# Altium PCB balancing_robot_board.PcbDoc (part 1 of 2)
Units mm, origin at the board's own origin, x right, y up, seen from the top; angles counter-clockwise.
Board outline 65.02 x 38.99 mm, 2 copper layers (Top Layer, Bottom Layer); 76 components, 73 nets, 356 pads, 230 vias.
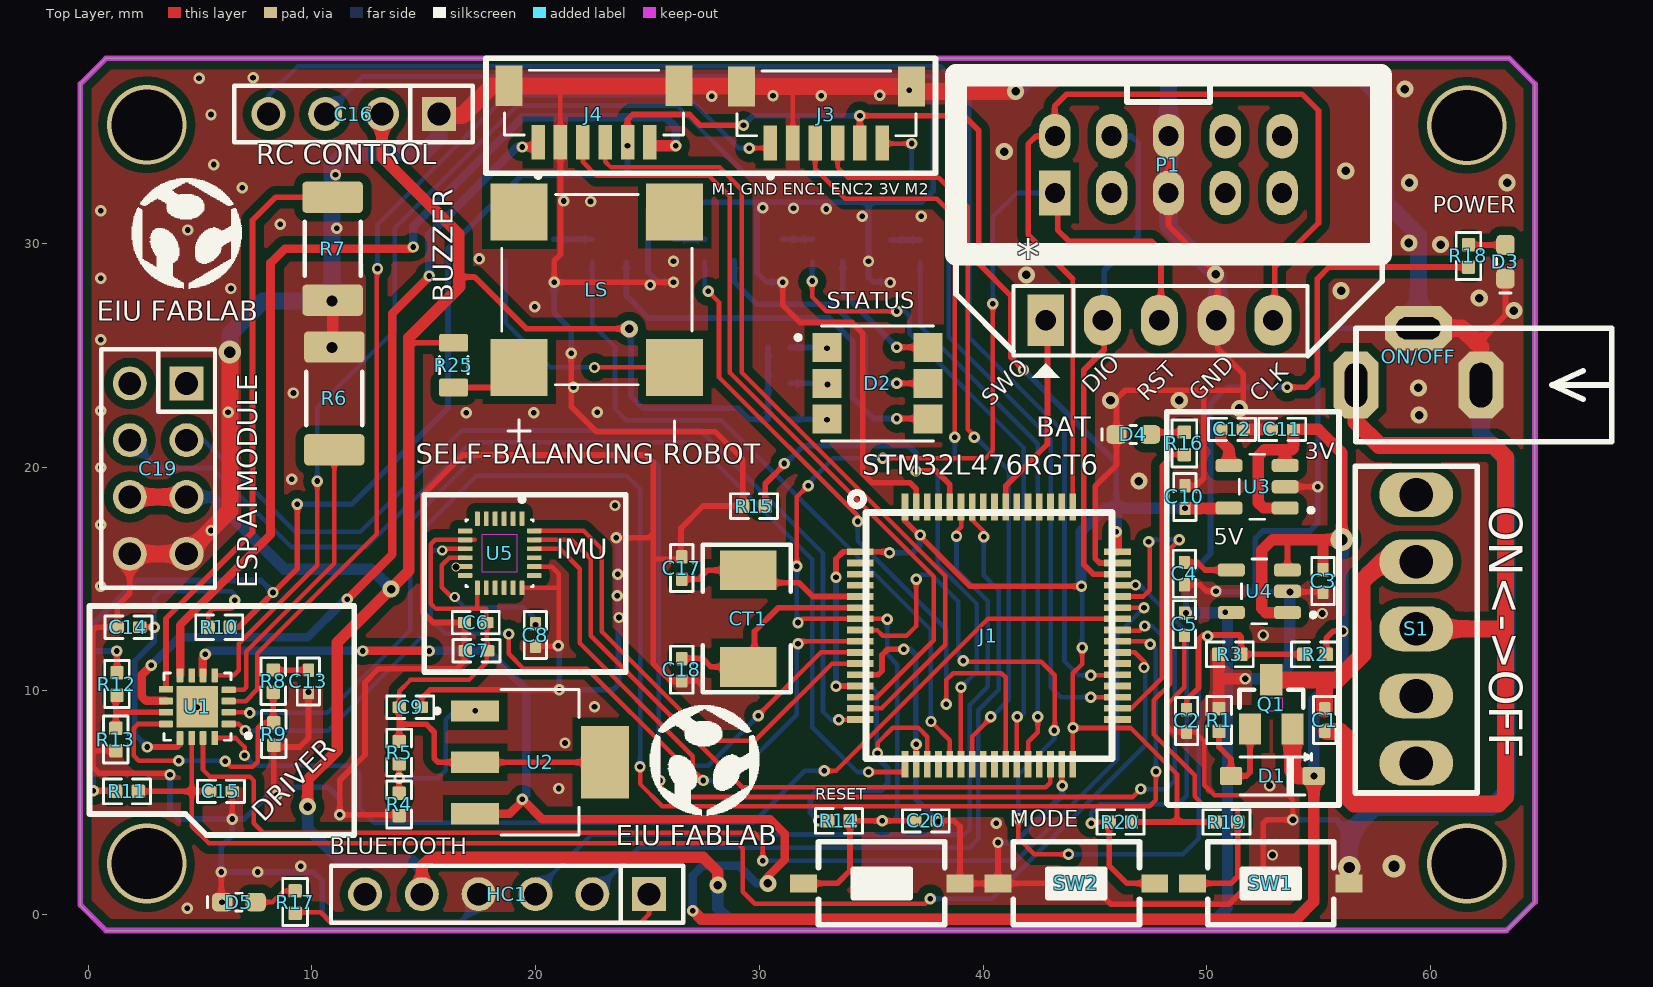
[diagram p0: Top Layer view]
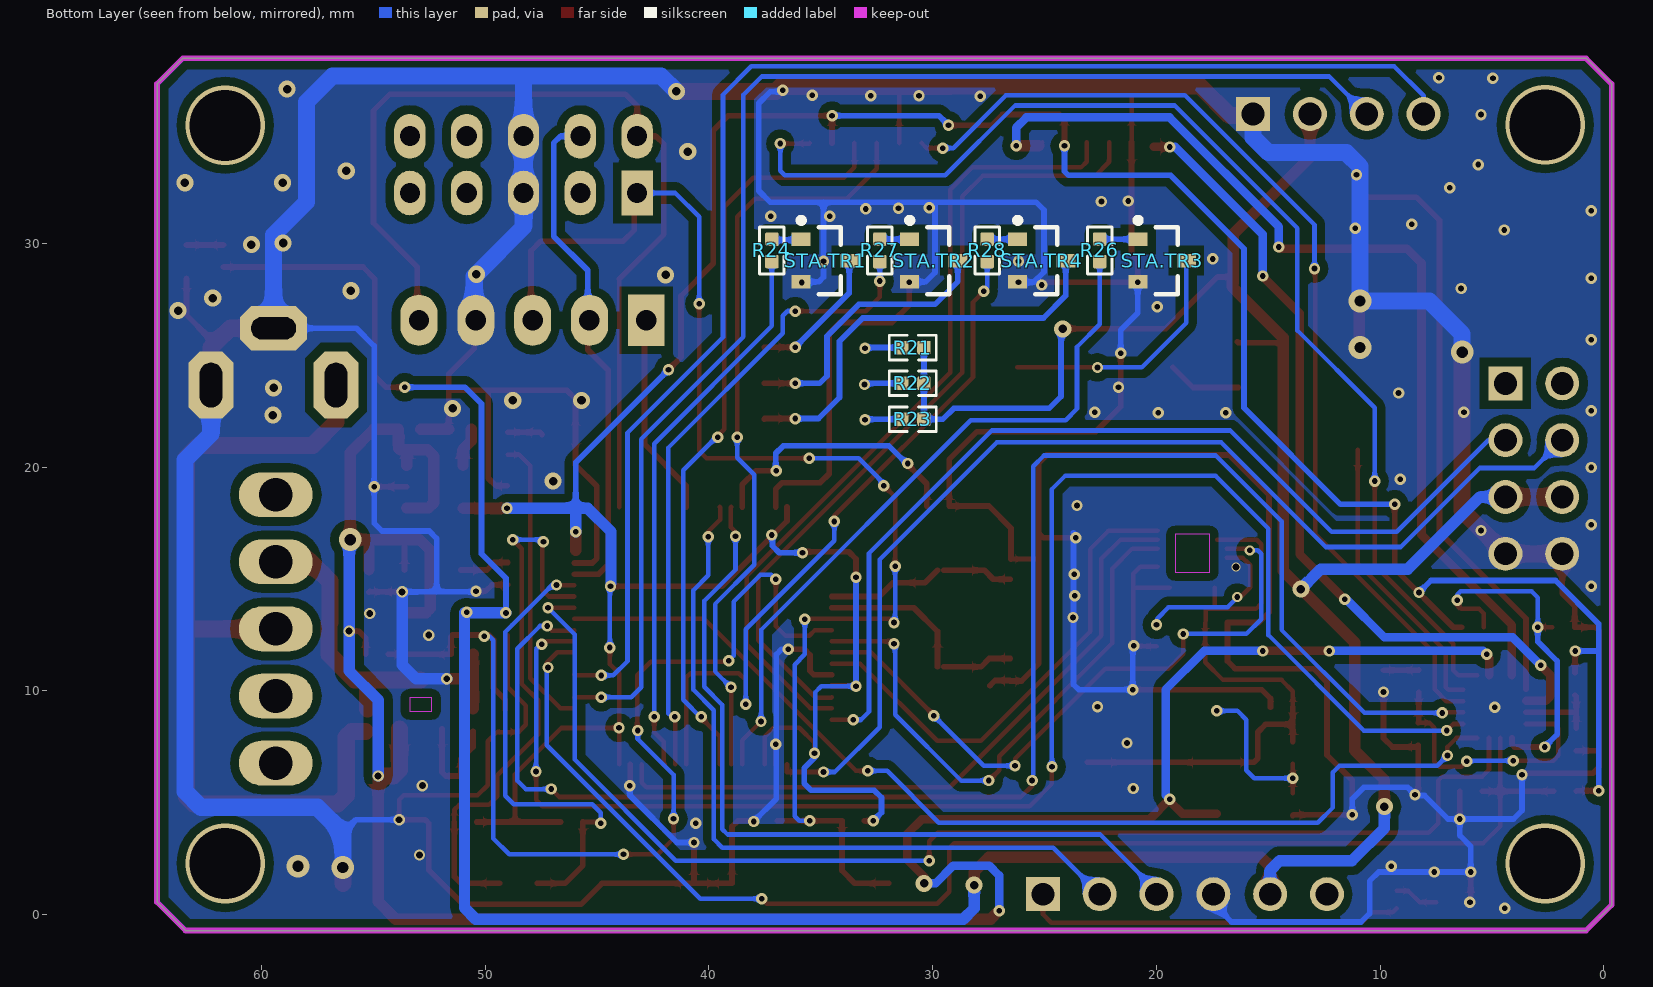
[diagram p1: Bottom Layer view, seen from below]
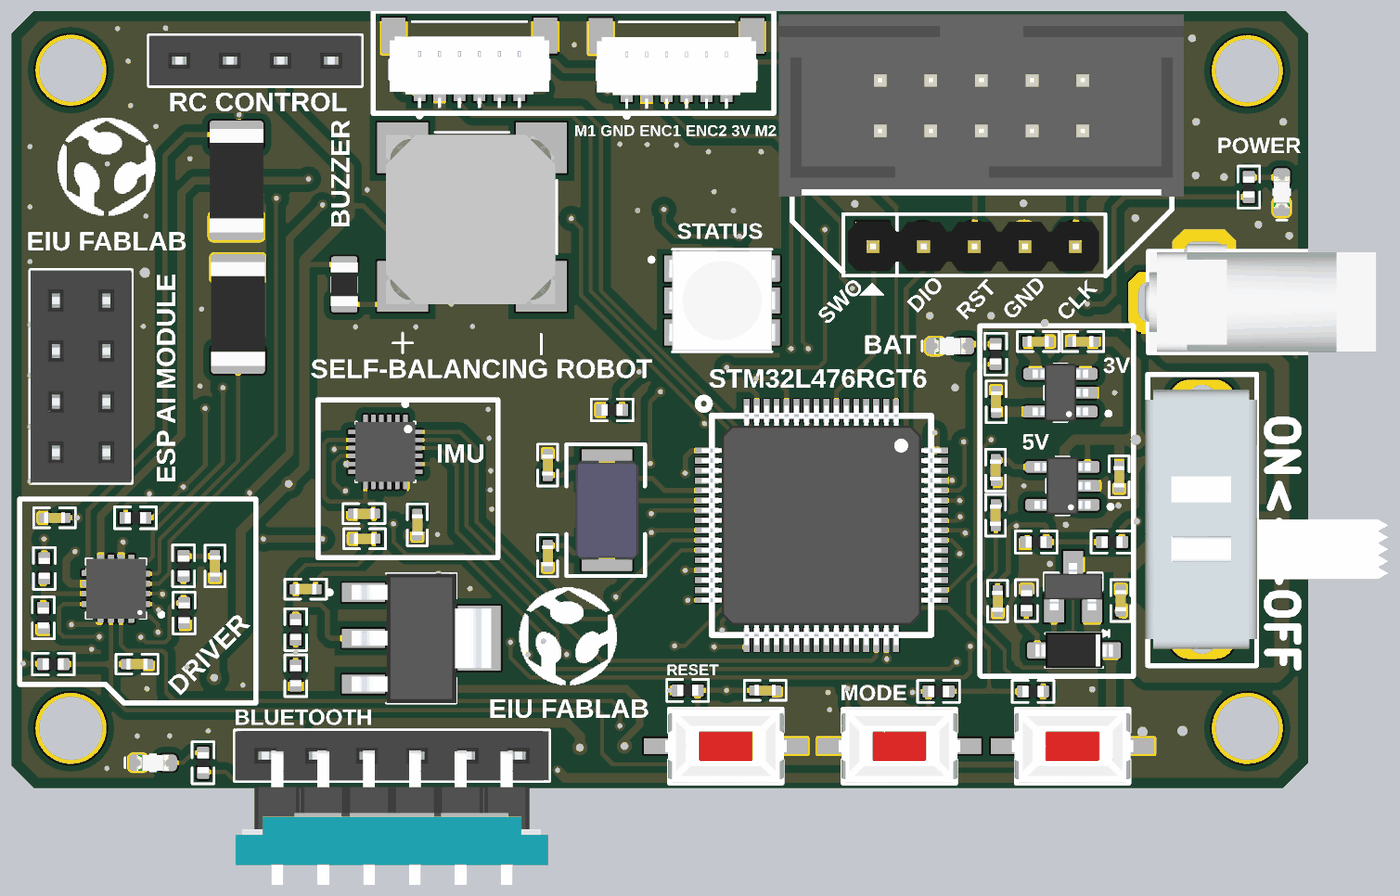
[diagram p2: 3D render of the assembled board from above, using the file's embedded part models]
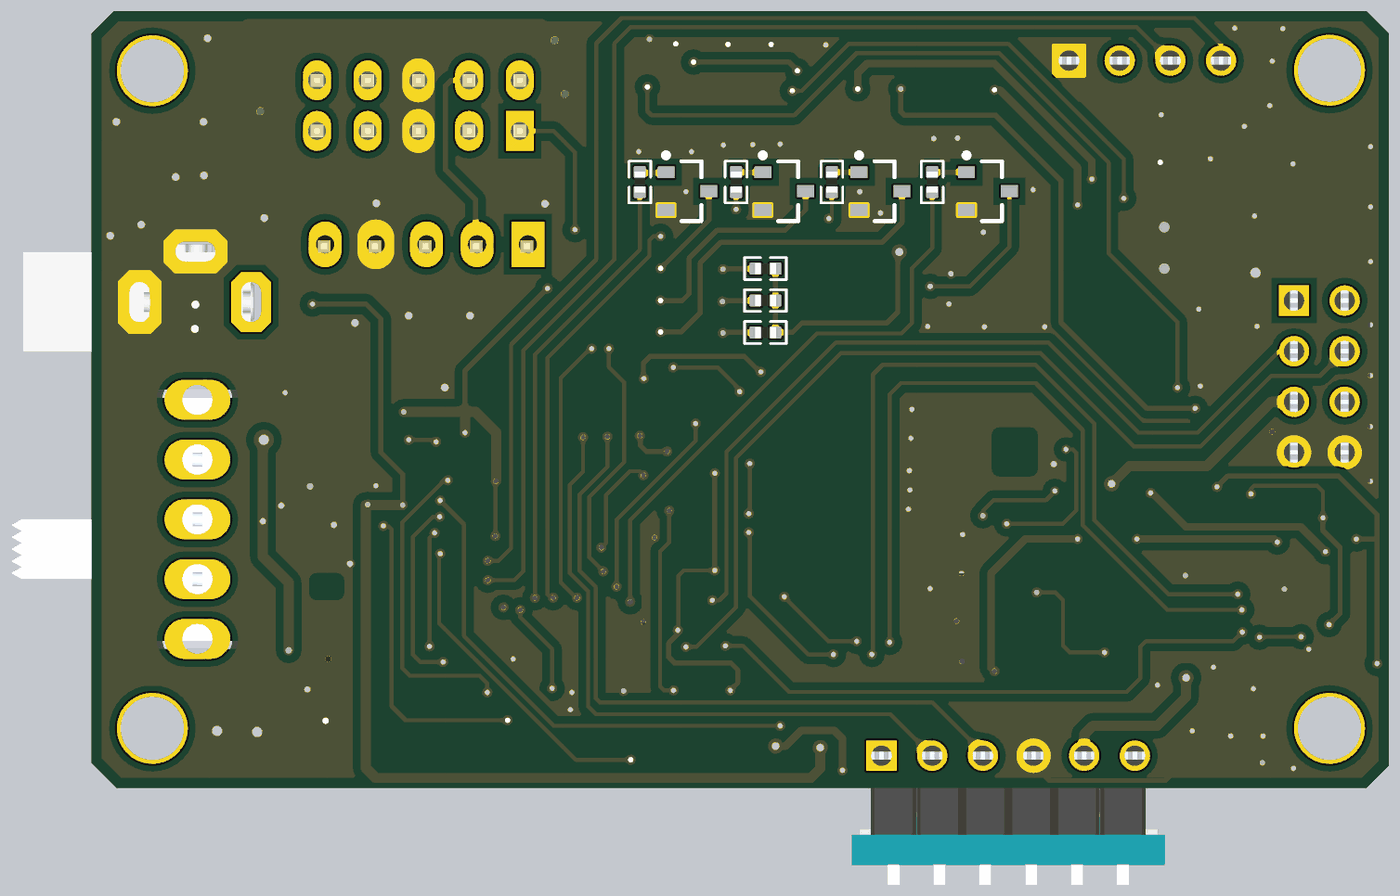
[diagram p3: 3D render of the assembled board from below, using the file's embedded part models]

## Layer stack, top to bottom
Top Solder: solder mask 0.0102, Solder Resist, Dk 3.5
Top Layer: signal copper 0.0356
Dielectric 1: dielectric 0.32, FR-4, Dk 4.8
Bottom Layer: signal copper 0.0356
Bottom Solder: solder mask 0.0102, Solder Resist, Dk 3.5

## Board outline
63.398,-0.711 0.787,-0.711 -0.356,0.432 -0.356,37.135 0.787,38.278 63.525,38.278 64.668,37.135 64.668,0.559

## Design rules (kind name [scope] priority, off if disabled: settings)
Clearance [All] p1: gap=0.381 ignorepadtopadclearanceinfootprint=FALSE
PlaneConnect [All] p1: planeconnectstyle=Direct reliefexpansion=0.508 reliefentries=4 reliefconductorwidth=0.254 reliefairgap=0.254
PolygonConnect [All] p1: connectstyle=Direct reliefconductorwidth=0.254 reliefentries=4 polygonreliefangle="90 Angle" airgapwidth=0.254
RoutingVias [All] p1: holewidth=0.711 width=1.27 viastyle="Through Hole" minholewidth=0.711 minwidth=1.27 maxholewidth=0.711 maxwidth=1.27
SolderMaskExpansion [All] p1: expansion=0.102
Width [All] p1: maxlimit=0.762 minlimit=0.203 preferedwidth=0.254
29 further rules are at their usual default settings.

## Components (designator, comment, footprint, x,y, rotation, side; value= is the part's Value field where it differs from the comment)
* "JP5" JP5 42.799,26.568 r0 top
C1 "0.1u" CAPC1005X55N 55.27,8.695 r90 top
C2 "0.1u" CAPC1005X55N 49.098,8.661 r90 top
C3 "0.1u" CAPC1005X55N 55.194,14.91 r270 top
C4 "10nF" CAPC1005X55N 48.997,15.24 r270 top
C5 "10nF" CAPC1005X55N 48.997,12.979 r90 top
C6 "0.1uF" CAPC1005X55N 17.318,13.056 r180 top
C7 "1.0uF" CAPC1005X55N 17.348,11.799 r180 top
C8 "100nF" CAPC1005X55N 19.99,12.497 r270 top
C9 "100nF" CAPC1005X55N 14.394,9.271 r0 top
C10 "1uF" CAPC1005X55N 49.022,18.669 r270 top
C11 "1uF" CAPC1005X55N 53.373,21.692 r0 top
C12 "10nF" CAPC1005X55N 51.13,21.692 r180 top
C13 "22nF" CAPC1005X55N 9.842,10.428 r90 top
C14 "0.1uF" CAPC1005X55N 1.796,12.849 r0 top
C15 "0.1uF" CAPC1005X55N 5.931,5.509 r180 top
C16 "JP4" JP4-C1T 15.672,35.789 r180 top
C17 "20pF" CAPC1005X55N 26.53,15.494 r90 top
C18 "20pF" CAPC1005X55N 26.53,10.947 r270 top
C19 "JP4x2" JP4-C2T 3.124,19.939 r270 top
C20 "100nF" CAPC1005X55N 37.44,4.191 r180 top
CT1 "16Mhz" CRYSTAL-SMD5032 29.501,13.233 r90 top value=4Mhz
D1 "MMSZ5229BT1G" SOD123 52.934,6.198 r180 top
D2 "LTST-G563ZEGBW" LED_LTST-G563ZEGBW 35.281,23.749 r0 top
D3 "597-5112-402F" LEDSC160X80X70L45N 63.348,29.185 r90 top
D4 "597-5112-402F" LEDSC160X80X70L45N 46.711,21.463 r0 top
D5 "597-5112-402F" LEDSC160X80X70L45N 6.731,0.559 r0 top
HC1 "HC06" HC06 18.847,0.914 r180 top
J1 "STM32L476RGT6" LQFP-64(10X10)MM 40.259,12.471 r270 top
J3 "BM06B-SRSS-TB(LF)(SN)" JST_BM06B-SRSS-TB(LF)(SN) 32.993,36.268 r0 top
J4 "BM06B-SRSS-TB(LF)(SN)" JST_BM06B-SRSS-TB(LF)(SN) 22.606,36.297 r0 top
LS "KSSG74B17-3" XDCR_KSSG74B17-3 22.733,27.94 r90 top
ON/OFF "POWER" PJ-031D 56.667,23.673 r90 top
P1 "STLINK" "CABLE 10" 43.205,32.258 r0 top
Q1 "SI2323DS-T1-GE3" SOT23 52.883,9.398 r0 top
R1 "Thick Film" RESC1005X40N 50.546,8.695 r270 top value=100K
R2 "Thick Film" RESC1005X40N 54.839,11.633 r0 top value=20K
R3 "Thick Film" RESC1005X40N 51.029,11.633 r0 top value=10K
R4 "Thick Film" RESC1005X40N 13.894,4.928 r270 top value=120
R5 "Thick Film" RESC1005X40N 13.894,7.239 r270 top value=240
R6 "Thick Film" RESC5025X70N 10.998,23.077 r90 top value=0.33
R7 "Thick Film" RESC5025X70N 10.922,29.769 r270 top value=0.33
R8 "Thick Film" RESC1005X40N 8.267,10.436 r270 top value=1K
R9 "Thick Film" RESC1005X40N 8.293,8.074 r90 top value=47K
R10 "Thick Film" RESC1005X40N 5.854,12.849 r0 top value=20K
R11 "Thick Film" RESC1005X40N 1.732,5.509 r180 top value=20K
R12 "Thick Film" RESC1005X40N 1.282,10.309 r90 top value=200K
R13 "Thick Film" RESC1005X40N 1.232,7.828 r90 top value=30K
R14 "Thick Film" RESC1005X40N 33.553,4.191 r0 top value=4.7K
R15 "Thick Film" RESC1005X40N 29.761,18.263 r180 top value=1K
R16 "Thick Film" RESC1005X40N 48.997,21.065 r90 top value=1K
R17 "Thick Film" RESC1005X40N 9.246,0.559 r90 top value=1K
R18 "Thick Film" RESC1005X40N 61.697,29.447 r90 top value=1K
R19 "Thick Film" RESC1005X40N 50.876,4.14 r0 top value=1K
R20 "Thick Film" RESC1005X40N 46.134,4.14 r180 top value=1K
R21 "Thick Film" RESC1005X40N 30.886,25.349 r0 bottom value=330
R22 "Thick Film" RESC1005X40N 30.886,23.749 r0 bottom value=330
R23 "Thick Film" RESC1005X40N 30.886,22.149 r0 bottom value=330
R24 "Thick Film" RESC1005X40N 37.186,29.693 r270 bottom value=1K
R25 "Jumper" RESC2012N_ZERO 16.332,24.562 r270 top value=220R
R26 "Thick Film" RESC1005X40N 22.53,29.693 r270 bottom value=330
R27 "Thick Film" RESC1005X40N 32.36,29.693 r270 bottom value=1K
R28 "Thick Film" RESC1005X40N 27.559,29.693 r270 bottom value=1K
RESET "RESET" SW1-SMD 35.464,1.397 r0 top value="SW chip 2 pin" (schematic designator SW3)
S1 "ON-ON" Switch 59.36,18.773 r270 top
STA.TR1 "TR815" SOT-23B_L 34.798,29.235 r180 bottom value=C1815
STA.TR2 "TR815" SOT-23B_L 29.947,29.235 r180 bottom value=C1815
STA.TR3 "TR815" SOT-23B_L 19.736,29.235 r180 bottom value=C1815
STA.TR4 "TR815" SOT-23B_L 25.121,29.235 r180 bottom value=C1815
SW1 "RESET" SW1-SMD 52.857,1.397 r180 top value="SW chip 2 pin"
SW2 "RESET" SW1-SMD 44.171,1.397 r0 top value="SW chip 2 pin"
U1 "STSPIN240" VFQFPN_3X3X1MM 4.877,9.296 r180 top
U2 "LM317DCYG3" SOT230P700X180-4N 20.193,6.807 r0 top
U3 "LP2985AIM5-3.0" SOT95P280X145-5N 52.248,19.126 r180 top
U4 "LP2985AIM5-5.0" SOT95P280X145-5N 52.349,14.453 r180 top
U5 "ICM-20948" QFN40P300X300X105-24N 18.39,16.154 r270 top

## Footprints (in the part's own frame and the unit in brackets; to place one, negate y for a bottom-side part, rotate by r counter-clockwise, add the part's x,y. Pads: shape width x height; smd on the part's side, far side on the other; paste and mask are expansions set on the pad)
"CABLE 10" [mm] "Connector; Header; 5x2 Position"
  rect 1.4x2 hole 0.9: 1(0,0)
  oval 1.4x2 hole 0.9: 2(0,2.54) 3(2.54,0) 4(2.54,2.54) 5(5.08,0) 6(5.08,2.54) 7(7.62,0) 8(7.62,2.54) 9(10.16,0) 10(10.16,2.54)
  silkscreen extent -4.42,-2.73 14.58,5.27, body extent -5.08,-3.3 15.24,5.84, height 9.86
CAPC1005X55N [mm] "Chip Capacitor, Body 1.0x0.5mm, EIA 0402, IPC Medium Density"
  round 0.2 on Mech15: 0(0,0)
  rrect20% 0.6x0.5 smd: 1(-0.5,0) 2(0.5,0)
  Top Layer pour cut-out: -0.325,0.375 -0.2,0.5 0.2,0.5 0.325,0.375 0.325,-0.375 0.2,-0.5 -0.2,-0.5 -0.325,-0.375
  silkscreen extent -1.05,-0.5 1.05,0.5, body extent -0.52,-0.27 0.53,0.28, height 0.55
CRYSTAL-SMD5032 [mil] "DO-214-AA/SMB; 2 C-Bend Leads; Body 5.3 x 3.6 mm, inc. leads (LxW)"
  rect 70x100 smd: 1(-85,0) 2(85,0)
  silkscreen extent -130,-75 130,80, body extent -98,-63 98,63, height 51
HC06 [mm]
  rect 1.52x1.52 hole 1.02: 1(-6.223,0)
  round 1.52 hole 1.02: 2(-3.683,0) 3(-1.143,0) 4(1.397,0) 5(3.937,0) 6(6.477,0)
  silkscreen extent -7.74,-1.27 8,1.27, body extent -7.74,-1.25 8,6.48, height 46
JP4-C1T [mm] "4 row, straight, gold plating"
  rect 1.52x1.52 hole 1.02: 1(0,0)
  round 1.52 hole 1.02: 2(2.54,0) 3(5.08,0) 4(7.62,0)
  silkscreen extent -1.52,-1.27 9.14,1.27, body extent -1.52,-1.25 9.14,1.25, height 8.51
JP4-C2T [mm] "8 pins, dual row, straight, gold plating"
  rect 1.52x1.52 hole 1.02: 1(-3.81,1.27)
  round 1.52 hole 1.02: 2(-1.27,1.27) 3(1.27,1.27) 4(3.81,1.27) 5(3.81,-1.27) 6(1.27,-1.27) 7(-1.27,-1.27) 8(-3.81,-1.27)
  silkscreen extent -5.33,-2.54 5.33,2.54, body extent -5.33,-2.54 5.33,2.54, height 8.51
JP5 [mil] "JP5"
  rect 65x90 hole 36: 1(0,0)
  oval 65x90 hole 36: 2(100,0) 3(200,0) 4(300,0) 5(400,0)
  silkscreen extent -57,-101 461,60, body extent -48,-53 448,45, height 323
JST_BM06B-SRSS-TB(LF)(SN) [mm]
  rect 0.6x1.55 smd: 1(-2.5,-1.775) 2(-1.5,-1.775) 3(-0.5,-1.775) 4(0.5,-1.775) 5(1.5,-1.775) 6(2.5,-1.775)
  rect 1.2x1.8 smd: S1(-3.8,0.75) S2(3.8,0.75)
  silkscreen extent -4,-3.35 4,1.45, body extent -4,-2.9 4,0.7, height 4.25
LED_LTST-G563ZEGBW [mm]
  rect 1.3x1.3 smd: 1(-2.25,1.6) 2(-2.25,0) 3(-2.25,-1.6) 4(2.25,-1.6) 5(2.25,0) 6(2.25,1.6)
  silkscreen extent -3.65,-2.57 2.5,2.57, body extent -2.7,-2.5 2.7,2.5, height 1.6
LEDSC160X80X70L45N [mm]
  rrect53% 0.91x0.83 smd: A(0.75,0) C(-0.75,0)
  silkscreen extent -1.4,-0.4 0.14,0.4, body extent -0.8,-0.4 0.8,0.4, height 0.7
LQFP-64(10X10)MM [mm]
  rect 0.3x1.2 smd mask+0.05: 1(-3.75,-5.75) 2(-3.25,-5.75) 3(-2.75,-5.75) 4(-2.25,-5.75) 5(-1.75,-5.75) 6(-1.25,-5.75) 7(-0.75,-5.75) 8(-0.25,-5.75) 9(0.25,-5.75) 10(0.75,-5.75) 11(1.25,-5.75) 12(1.75,-5.75) 13(2.25,-5.75) 14(2.75,-5.75) 15(3.25,-5.75) 16(3.75,-5.75) 33(3.75,5.75) 34(3.25,5.75) 35(2.75,5.75) 36(2.25,5.75) 37(1.75,5.75) 38(1.25,5.75) 39(0.75,5.75) 40(0.25,5.75) 41(-0.25,5.75) 42(-0.75,5.75) 43(-1.25,5.75) 44(-1.75,5.75) 45(-2.25,5.75) 46(-2.75,5.75) 47(-3.25,5.75) 48(-3.75,5.75)
  rect 1.2x0.3 smd mask+0.05: 17(5.75,-3.75) 18(5.75,-3.25) 19(5.75,-2.75) 20(5.75,-2.25) 21(5.75,-1.75) 22(5.75,-1.25) 23(5.75,-0.75) 24(5.75,-0.25) 25(5.75,0.25) 26(5.75,0.75) 27(5.75,1.25) 28(5.75,1.75) 29(5.75,2.25) 30(5.75,2.75) 31(5.75,3.25) 32(5.75,3.75) 49(-5.75,3.75) 50(-5.75,3.25) 51(-5.75,2.75) 52(-5.75,2.25) 53(-5.75,1.75) 54(-5.75,1.25) 55(-5.75,0.75) 56(-5.75,0.25) 57(-5.75,-0.25) 58(-5.75,-0.75) 59(-5.75,-1.25) 60(-5.75,-1.75) 61(-5.75,-2.25) 62(-5.75,-2.75) 63(-5.75,-3.25) 64(-5.75,-3.75)
  silkscreen extent -6.4,-6.2 5.5,5.5, body extent -6,-6 6,6, height 1.6
PJ-031D [mm] "Power Header 1mm"
  oct 3x2 hole 1 slot 2 at 0 deg paste+1: 1(0,0) 3(0,-5.588)
  oct 2x3 hole 1 slot 2 at 90 deg paste+1: 2(2.54,-2.794)
  silkscreen extent -2.54,-11.43 2.54,0, body extent -2.5,-11.43 2.9,0.17, height 7.4
QFN40P300X300X105-24N [mm]
  rrect25% 0.64x0.22 smd: 1(-1.545,1) 2(-1.545,0.6) 3(-1.545,0.2) 4(-1.545,-0.2) 5(-1.545,-0.6) 6(-1.545,-1) 13(1.545,-1) 14(1.545,-0.6) 15(1.545,-0.2) 16(1.545,0.2) 17(1.545,0.6) 18(1.545,1)
  rrect25% 0.22x0.64 smd: 7(-1,-1.545) 8(-0.6,-1.545) 9(-0.2,-1.545) 10(0.2,-1.545) 11(0.6,-1.545) 12(1,-1.545) 19(1,1.545) 20(0.6,1.545) 21(0.2,1.545) 22(-0.2,1.545) 23(-0.6,1.545) 24(-1,1.545)
  Keep-Out Layer region: 0.85,-0.77 -0.85,-0.77 -0.85,0.77 0.85,0.77
  silkscreen extent -2.5,-1.5 1.5,1.5, body extent -1.5,-1.5 1.5,1.5, height 1
RESC1005X40N [mm] "Chip Resistor, Body 1.0x0.5mm, EIA 0402, IPC Medium Density"
  round 0.2 on Mech15: 0(0,0)
  rrect20% 0.6x0.6 smd: 1(-0.5,0) 2(0.5,0)
  Top Layer pour cut-out: -0.325,0.375 -0.2,0.5 0.2,0.5 0.325,0.375 0.325,-0.375 0.2,-0.5 -0.2,-0.5 -0.325,-0.375
  silkscreen extent -1.05,-0.55 1.05,0.55, body extent -0.52,-0.27 0.53,0.28, height 0.4
RESC2012N_ZERO [mm] "Chip Resistor, Body 2.0x1.2mm, 0805, IPC Medium Density"
  round 0.254 on Mech15: 0(0,0)
  rrect25% 0.8x1.3 smd: 1(-1,0) 2(1,0)
  Top Layer pour cut-out: -0.725,0.65 -0.525,0.85 0.525,0.85 0.725,0.65 0.725,-0.65 0.525,-0.85 -0.525,-0.85 -0.725,-0.65
  silkscreen extent -0.38,-0.64 0.38,0.64, body extent -1.1,-0.67 1.1,0.68, height 0.69
RESC5025X70N [mm] "Chip Resistor, Body 5.0x2.5mm, 2010, IPC Medium Density"
  round 0.508 on Mech15: 0(0,0)
  rrect25% 1.4x2.7 smd: 1(-2.3,0) 2(2.3,0)
  silkscreen extent -1.2,-1.25 1.2,1.25, body extent -2.6,-1.35 2.6,1.35, height 0.69
SOD123 [mm] "SOD-123; 2 Leads; Body 2.7 x 1.6 mm, (LxW)"
  round 0.508 on Mech15: 0(0,0)
  rrect25% 1x0.8 smd: A(1.85,0) K(-1.85,0)
  silkscreen extent -1.75,-1 1.45,0.85, body extent -1.95,-0.9 1.95,0.9, height 1.18
SOT23 [mm]
  rect 1x1.4 smd: 1(-0.95,-1.1) 2(0.95,-1.1) 3(0,1.1)
  Keep-Out Layer region: 0.5,-0.301 -0.501,-0.301 -0.501,0.3 0.5,0.3
  silkscreen extent -1.42,-0.15 1.42,0.66, body extent -1.46,-1.18 1.46,1.19, height 1.12
SOT95P280X145-5N [mm]
  rrect50% 1.21x0.59 smd: 1(-1.255,0.95) 2(-1.255,0) 3(-1.255,-0.95) 4(1.255,-0.95) 5(1.255,0.95)
  silkscreen extent -2.51,-1.45 0.8,1.45, body extent -1.4,-1.45 1.4,1.45, height 1.45
SOT230P700X180-4N [mm]
  rect 2.15x0.95 smd: 1(-2.9,2.3) 2(-2.9,0) 3(-2.9,-2.3)
  rect 2.15x3.25 smd: 4(2.9,0)
  silkscreen extent -4.7,-3.25 1.75,3.25, body extent -3.5,-3.25 3.5,3.25, height 1.8
SOT-23B_L [mm] "SOT23, 3-Leads, Body 2.9x1.3mm, Pitch 0.95mm, Lead Span 2.4mm, IPC High Density"
  rect 0.85x0.6 smd: 1(-1.075,-0.95) 2(1.075,0) 3(-1.075,0.95)
  silkscreen extent -1.2,-1.5 0.7,1.92, body extent -0.7,-1.5 0.7,1.5, height 1.14
SW1-SMD [mm]
  rect 1.2x0.8 smd: 1(-3.5,0) 2(3.5,0)
  silkscreen extent -2.82,-1.85 2.82,1.85, body extent -3.05,-1.85 3.05,1.85, height 2.5
Switch [mm]
  oval 2x3.302 hole 1.5: 1(3,0) 2(6,0) 3(9,0) 4(0,0) 5(12,0)
  silkscreen extent -1.27,-2.73 13.33,2.73, body extent -0.5,-2.85 12.5,9.35, height 2.6
VFQFPN_3X3X1MM [mm]
  rrect25% 0.63x0.3 smd: 1(-1.4,0.775) 2(-1.4,0.25) 3(-1.4,-0.25) 4(-1.4,-0.75) 9(1.4,-0.775) 10(1.4,-0.25) 11(1.4,0.25) 12(1.4,0.775)
  rrect25% 0.3x0.63 smd: 5(-0.775,-1.4) 6(-0.25,-1.4) 7(0.25,-1.4) 8(0.775,-1.4) 13(0.775,1.4) 14(0.25,1.4) 15(-0.25,1.4) 16(-0.775,1.4)
  rect 1.85x1.85 smd paste-0.385: 17(0,0)
  silkscreen extent -2.37,-1.5 1.5,1.5, body extent -1.5,-1.5 1.5,1.5, height 1
XDCR_KSSG74B17-3 [mm]
  rect 2.55x2.55 smd: N(-3.475,-3.475) NC1(3.475,3.475) NC2(3.475,-3.475) P(-3.475,3.475)
  silkscreen extent -6.88,-4.25 4.25,4.25, body extent -4.38,-4.18 4.12,4.32, height 4.05

## Part data
C1 C2 C3 C4 C5 C6 C7 C8 C9 C10 C11 C12 C13 C14 C15 C17 C18 C20: library part "CAP C_0402", "Capacitor SMD Cer 1nF 10% 16V X7R 0402", Manufacturer 1="AVX Corporation", Manufacturer 2=Yageo, Manufacturer Part Number 1=0402YC102KAT2A, Manufacturer Part Number 2=CC0402KRX7R7BB102, Operating Temperature="-55°C ~ 125°C", Package / Case="0402 (1005 Metric)", Ratings="16V; X7R", Supplier Part Number 1=478-6197-1-ND, Tolerance=±10%, ComponentLink1Description=http://www.avx.com/docs/Catalogs/cx7r.pdf, ComponentLink1URL=http://www.avx.com/docs/Catalogs/cx7r.pdf, ComponentLink2Description=http://www.yageo.com/documents/recent/UPY-GPHC_X7R_6.3V-to-50V_8.pdf, ComponentLink2URL=http://www.yageo.com/documents/recent/UPY-GPHC_X7R_6.3V-to-50V_8.pdf, SCDType=spec, Size / Dimension="0.039\" L x 0.020\" W (1.00mm x 0.50mm)", Supplier 1=Digi-Key, Supplier 2=Digi-Key, Supplier Part Number 2=311-1352-1-ND
C16: "WR-PHD 2.54 mm Angled Socket Header", Manufacturer="W¨¹rth Elektronik eiSos GmbH", partNo=613004143121, ComponentLink1 Description=Manufacturer, ComponentLink1URL=http://www.we-online.com, ComponentLink2 Description=Datasheet, ComponentLink2URL=http://katalog.we-online.de/em/datasheet/6130xx143121.pdf, Created by="Karrer Zheng", Created Date="29 March 2013", NoPins=04
C19: "WR-PHD 2.54 mm Dual Socket Header", Manufacturer="W¨¹rth Elektronik eiSos GmbH", partNo=61300821821, ComponentLink1 Description=Manufacturer, ComponentLink1URL=http://www.we-online.com, ComponentLink2 Description=Datasheet, ComponentLink2URL=http://katalog.we-online.de/em/datasheet/6130xx21821.pdf, Created by="Karrer Zheng", Created Date="29 March 2013", NoPins=08
CT1: library part CRYSTAL, "Crystal For all Crystal 2pin."
D1: library part DIODE_ZENER_4.7V_500mW, "Diode Zener SMD 4.7V 0.5W SOD-123", Manufacturer 1="Fairchild Semiconductor", Manufacturer Part Number 1=MMSZ4688, Package / Case=SOD-123, Ratings="4.7V; 0.5W; Vf=900mV @ 10mA", Supplier Part Number 1=MMSZ4688-ND, Tolerance=±5%, Diode Type=Zener, Material=Si, SCDType=source, Supplier 1=Digi-Key
D2: "LED; SMD; 5050, PLCC6; RGB; 5x5x1.6mm; 120°; 20mA; Lens: transparent", Package="PLCC-6 Lite-On", Availability="Not in stock", Check_prices=https://www.snapeda.com/parts/LTST-G563ZEGBW/Lite-On/view-part/?ref=eda, MF=Lite-On, MP=LTST-G563ZEGBW, Price=None, SnapEDA_Link=https://www.snapeda.com/parts/LTST-G563ZEGBW/Lite-On/view-part/?ref=snap
D3 D4 D5: "SMD LED 0603 R SAMPLE STRIP; Discretes", Package="0603 Dialight", Check_prices=https://www.snapeda.com/parts/597-5112-402F/Dialight/view-part/?ref=eda, MF=Dialight, MP=597-5112-402F, SnapEDA_Link=https://www.snapeda.com/parts/597-5112-402F/Dialight/view-part/?ref=snap
HC1: Manufacturer="W¨¹rth Elektronik eiSos GmbH", partNo=613004143121, ComponentLink1 Description=Manufacturer, ComponentLink1URL=http://www.we-online.com, ComponentLink2 Description=Datasheet, ComponentLink2URL=http://katalog.we-online.de/em/datasheet/6130xx143121.pdf, Created by="Karrer Zheng", Created Date="29 March 2013", NoPins=04
J1: "ARM® Cortex®-M4 STM32L4 Microcontroller IC 32-Bit Single-Core 80MHz 1MB (1M x 8) FLASH 64-LQFP (10x10)", Package="LQFP-64 STMicroelectronics", Check_prices=https://www.snapeda.com/parts/STM32L476RGT6/STMicroelectronics/view-part/?ref=eda, MF=STMicroelectronics, MP=STM32L476RGT6, SnapEDA_Link=https://www.snapeda.com/parts/STM32L476RGT6/STMicroelectronics/view-part/?ref=snap
J3 J4 LS: Package=None, Availability=Unavailable, Price=None
  J3 J4: MP=BM06B-SRSS-TB(LF)(SN)
  LS: MP=KSSG74B17-3
ON/OFF: library part DCIN
P1: library part "CABLE 10", "Header, 5-Pin, Dual row", LatestRevisionDate=17-Jul-2002, LatestRevisionNote="Re-released for DXP Platform.", Publisher="Altium Limited"
Q1: "20V 4.7A 1.25W 39 mohms @ 4.5V", Package="SOT-23-3 Vishay Siliconix", Check_prices=https://www.snapeda.com/parts/SI2323DS-T1-GE3/Vishay/view-part/?ref=eda, MF="Vishay Siliconix", MP=SI2323DS-T1-GE3, SnapEDA_Link=https://www.snapeda.com/parts/SI2323DS-T1-GE3/Vishay/view-part/?ref=snap
R1 R2 R3 R4 R5 R8 R9 R10 R11 R12 R13 R14 R15 R16 R17 R18 R19 R20 R21 R22 R23 R24 R26 R27 R28: library part RES_0402, "Resistor SMD chip 1k Ohm 0.063W 5% 0402", Manufacturer 1=Yageo, Manufacturer 2="Vishay Dale", Manufacturer 3="Samsung Electro-Mechanics America, Inc", Manufacturer 4="Rohm Semiconductor", Manufacturer 5="Panasonic Electronic Components", Manufacturer Part Number 1=RC0402JR-071KL, Manufacturer Part Number 2=CRCW04021K00JNED, Manufacturer Part Number 3=RC1005J102CS, Manufacturer Part Number 4=MCR01MRTJ102, Manufacturer Part Number 5=ERJ-2GEJ102X, Package / Case="0402 (1005 Metric)", Ratings="1/16 W", Supplier Part Number 1=311-1.0KJRCT-ND, Tolerance=±5%, ComponentLink1Description=http://www.yageo.com/documents/recent/PYu-RC0402_51_RoHS_L_6.pdf, ComponentLink1URL=http://www.yageo.com/documents/recent/PYu-RC0402_51_RoHS_L_6.pdf, ComponentLink2Description=http://www.vishay.com/doc?20035, ComponentLink2URL=http://www.vishay.com/doc?20035, ComponentLink3Description=http://www.samsungsem.com/servlet/FileDownload?filename=productcatalog/pdf/Chip_Resistor.pdf, ComponentLink3URL=http://www.samsungsem.com/servlet/FileDownload?filename=productcatalog/pdf/Chip_Resistor.pdf, ComponentLink4Description=http://rohmfs.rohm.com/en/products/databook/datasheet/passive/resistor/chip_resistor/mcr_g.pdf, ComponentLink4URL=http://rohmfs.rohm.com/en/products/databook/datasheet/passive/resistor/chip_resistor/mcr_g.pdf, ComponentLink5Description=http://industrial.panasonic.com/www-cgi/jvcr13pz.cgi?E+PZ+3+AOA0001+ERJ2GEJ102X+7+WW, ComponentLink5URL=http://industrial.panasonic.com/www-cgi/jvcr13pz.cgi?E+PZ+3+AOA0001+ERJ2GEJ102X+7+WW, RoHS 1="RoHS Compliant", RoHS 2="RoHS Compliant", RoHS 3="RoHS Compliant", RoHS 4="RoHS Compliant", RoHS 5="RoHS Compliant", SCDType=spec, Supplier 1=Digi-Key, Supplier 2=Digi-Key, Supplier 3=Digi-Key, Supplier 4=Digi-Key, Supplier 5=Digi-Key, Supplier Part Number 2=541-1.0KJCT-ND, Supplier Part Number 3=1276-4376-1-ND, Supplier Part Number 4=RHM1.0KCECT-ND, Supplier Part Number 5=P1.0KJCT-ND
R6: library part RES_2010, "Resistor SMD chip 10 Ohm 0.25W 1% 2010", Manufacturer 1=Vishay/Dale, Manufacturer Part Number 1=CRCW120610R0JNEA, Package / Case=2010, Ratings=1/4W, Supplier Part Number 1=541-10ECT-ND, Tolerance=±1%, ComponentLink1Description=http://www.vishay.com/doc?20035, ComponentLink1URL=http://www.vishay.com/doc?20035, SCDType=undef, Supplier 1=Digi-Key
R7: library part RES_2010, "Resistor SMD chip 10 Ohm 0.25W 5% 2010", Manufacturer 1=Vishay/Dale, Manufacturer Part Number 1=CRCW120610R0JNEA, Package / Case=2010, Ratings=1/4W, Supplier Part Number 1=541-10ECT-ND, Tolerance=±1%, ComponentLink1Description=http://www.vishay.com/doc?20035, ComponentLink1URL=http://www.vishay.com/doc?20035, SCDType=undef, Supplier 1=Digi-Key
R25: library part RES_0805, "Resistor SMD chip 0.0 Ohm 0.125W 0805", Manufacturer 1="Samsung Electro-Mechanics America, Inc", Manufacturer 2="Stackpole Electronics Inc", Manufacturer 3=Yageo, Manufacturer 4="Panasonic Electronic Components", Manufacturer 5="Rohm Semiconductor", Manufacturer Part Number 1=RC2012J000CS, Manufacturer Part Number 2=RMCF0805ZT0R00, Manufacturer Part Number 3=RC0805JR-070RL, Manufacturer Part Number 4=ERJ-6GEY0R00V, Manufacturer Part Number 5=MCR10ERTJ000, Package / Case="0805 (2012 metric)", Ratings=1/8W, Supplier Part Number 1=1276-5466-6-ND, Tolerance=N/A, ComponentLink1Description=http://www.samsungsem.com/servlet/FileDownload?filename=productcatalog/pdf/Chip_Resistor.pdf, ComponentLink1URL=http://www.samsungsem.com/servlet/FileDownload?filename=productcatalog/pdf/Chip_Resistor.pdf, ComponentLink2Description=http://www.seielect.com/Catalog/SEI-RMCF_RMCP.pdf, ComponentLink2URL=http://www.seielect.com/Catalog/SEI-RMCF_RMCP.pdf, ComponentLink3Description=http://media.digikey.com/pdf/Data%20Sheets/Yageo%20PDFs/RC0805%20Pb%20Free.pdf, ComponentLink3URL=http://media.digikey.com/pdf/Data%20Sheets/Yageo%20PDFs/RC0805%20Pb%20Free.pdf, ComponentLink4Description=http://industrial.panasonic.com/www-cgi/jvcr13pz.cgi?E+PZ+3+AOA0001+ERJ6GEY0R00V+7+WW, ComponentLink4URL=http://industrial.panasonic.com/www-cgi/jvcr13pz.cgi?E+PZ+3+AOA0001+ERJ6GEY0R00V+7+WW, ComponentLink5Description=http://rohmfs.rohm.com/en/products/databook/datasheet/passive/resistor/chip_resistor/mcr_g.pdf, ComponentLink5URL=http://rohmfs.rohm.com/en/products/databook/datasheet/passive/resistor/chip_resistor/mcr_g.pdf, RoHS 1="RoHS Compliant", RoHS 2="RoHS Compliant", RoHS 3="RoHS Compliant", RoHS 4="RoHS Compliant", RoHS 5="RoHS Compliant", SCDType=spec, Supplier 1=Digi-Key, Supplier 2=Digi-Key, Supplier 3=Digi-Key, Supplier 4=Digi-Key, Supplier 5=Digi-Key, Supplier Part Number 2=RMCF0805ZT0R00DKR-ND, Supplier Part Number 3=311-0.0ARDKR-ND, Supplier Part Number 4=P0.0ADKR-ND, Supplier Part Number 5=RHM0.0CPDKR-ND
RESET SW1 SW2: library part SW2, "Switch button 2 pin"
S1: library part SW_THD_SPDT_On-On, "Switch THD vertical toggle SPDT", Contact Rating @ Voltage="0.25A @ 125VAC", Manufacturer 1="TE Connectivity", Manufacturer Part Number 1=SLS121PC04, Supplier Part Number 1=450-1598-ND, Circuit=SPDT, Mounting Type="PCB mount", SCDType=spec, Supplier 1=Digi-Key, Switch Function=On-On
STA.TR1 STA.TR2 STA.TR3 STA.TR4: library part C1815, "NPN 600mW, ECB", =C2383
U1: "Half Bridge (4) Driver DC Motors, General Purpose Power MOSFET 16-VFQFPN (3x3)", Package="VFQFN-16 STMicroelectronics", Check_prices=https://www.snapeda.com/parts/STSPIN240/STMicroelectronics/view-part/?ref=eda, MF=STMicroelectronics, MP=STSPIN240, SnapEDA_Link=https://www.snapeda.com/parts/STSPIN240/STMicroelectronics/view-part/?ref=snap
U2: "1.5-A, 40-V, adjustable linear voltage regulator 4-SOT-223 0 to 125", Package="SOT-223-4 Texas Instruments", Check_prices=https://www.snapeda.com/parts/LM317DCYG3/Texas+Instruments/view-part/?ref=eda, MF="Texas Instruments", MP=LM317DCYG3, SnapEDA_Link=https://www.snapeda.com/parts/LM317DCYG3/Texas+Instruments/view-part/?ref=snap
U3 U4: "150-mA, 16-V, low-dropout voltage regulator with enable", Package="SOT-23-5 Texas Instruments", MF="Texas Instruments"
  U3: Check_prices=https://www.snapeda.com/parts/LP2985AIM5-3.0/NOPB/Texas+Instruments/view-part/?ref=eda, MP=LP2985AIM5-3.0/NOPB, SnapEDA_Link=https://www.snapeda.com/parts/LP2985AIM5-3.0/NOPB/Texas+Instruments/view-part/?ref=snap
  U4: Check_prices=https://www.snapeda.com/parts/LP2985AIM5-5.0/NOPB/Texas+Instruments/view-part/?ref=eda, MP=LP2985AIM5-5.0/NOPB, SnapEDA_Link=https://www.snapeda.com/parts/LP2985AIM5-5.0/NOPB/Texas+Instruments/view-part/?ref=snap
U5: "Accelerometer, Gyroscope, Magnetometer, 9 Axis Sensor I2C, SPI Output", Package="TFQFN-24 TDK InvenSense", Check_prices=https://www.snapeda.com/parts/ICM-20948/TDK/view-part/?ref=eda, MF="TDK InvenSense", MP=ICM-20948, SnapEDA_Link=https://www.snapeda.com/parts/ICM-20948/TDK/view-part/?ref=snap

## Via types
v1: diameter 0.508, hole 0.254, Top Layer to Bottom Layer, tented both sides, 184 vias
v2: diameter 0.762, hole 0.381, Top Layer to Bottom Layer, tented both sides, 24 vias
v3: diameter 0.508, hole 0.305, Top Layer to Bottom Layer, tented both sides, 9 vias
v4: diameter 1.016, hole 0.508, Top Layer to Bottom Layer, tented both sides, 6 vias
v5: diameter 3.556, hole 3.175, Top Layer to Bottom Layer, 4 vias
v6: diameter 0.457, hole 0.254, Top Layer to Bottom Layer, tented both sides, 2 vias
v7: diameter 0.406, hole 0.305, Top Layer to Bottom Layer, tented both sides, 1 vias

## Nets (pads, with @x,y where several pads share a name; then routed paths per layer and width w, separated by ;. In a path a pad name is that pad's centre, name@x,y a point inside that pad or via, vN(x,y) a via of type N, cw(c..) or ccw(c..) an arc to the next point about the centre after c; other vN are vias at no path point)
1.8V: C6.1 C7.1 C9.1 R5.1 U2.2 U2.4 U5.8 U5.13 | length 27.8
  Top Layer w0.203: C9.1 13.894,9.982 14.402,10.49 17.018,10.49 17.805,11.278 17.805,11.817 17.818,11.83 C6.1 ; 17.274,16.754 U5.8 15.51,16.754 15.316,16.561 15.316,13.894 15.545,13.665 17.39,13.665 ; U5.13 17.39,13.665 ; C6.1@17.79,13.129 17.79,13.665 17.39,13.665
  Top Layer w0.254: R5.1 13.894,8.505 ; C9.1 13.894,8.505 ; U2.4 U2.2 15.646,6.807 15.469,6.985 15.469,8.153 15.117,8.505 13.894,8.505
3V: C10.2 J1.1 J1.13 J1.19 J1.32 J1.48 J1.64 J3.5 J4.5 R10.2 R11.2 R12.2 R14.1 R19.1 R20.1 U3.5 | length 158.7
  Top Layer w0.203: v1(35.281,7.214) 35.281,7.671 35.966,8.357 37.109,8.357 37.509,7.957 J1.19 ; J1.32 44.009,10.786 44.425,11.201 v1(44.425,11.938) ; v1(44.018,8.357) 44.032,8.343 46.597,8.343 48.666,6.274 48.666,4.14
  Top Layer w0.254: v1(0.229,5.537) 1.203,5.537 R11.2 ; v1(1.27,11.786) 1.282,11.773 R12.2 ; R10.2 6.728,12.849 9.347,15.469 v1(9.347,18.339) ; J4.5 24.106,35.536 24.333,35.763 26.873,35.763 27.356,35.281 v1(29.286,35.281) ; v1(32.652,4.191) R14.1 ; v1(33.426,10.211) 33.513,10.221 J1.13 ; v1(33.426,15.088) 33.426,15.9 33.747,16.221 J1.1 35.772,16.221 v1(35.814,16.18) ; J3.5 v1(34.493,35.712) 39.141,35.712 39.802,35.052 39.802,29.108 41.25,27.661 41.25,24.917 v1(41.808,24.359) ; J1.64 36.509,17.593 39.421,14.681 v1(44.399,14.681) ; J1.48@45.949,16.282 J1.48 ; R20.1 48.666,4.14 R19.1
  Top Layer w0.508: J1.48@45.949,16.282 v1(45.949,17.12) ; v1(49.022,18.161) 50.978,18.161 U3.5
  Bottom Layer w0.203: v1(33.426,10.211) 34.976,10.211 35.255,9.931 35.255,7.391 35.408,7.239 35.382,7.214 v1(35.281,7.214) ; v1(44.399,14.681) 44.425,14.656 v1(44.425,11.938)
  Bottom Layer w0.254: v1(0.229,5.537) 0.229,11.76 ; v1(1.27,11.786) 0.254,11.786 0.229,11.76 ; v1(8.255,14.402) 7.722,14.935 2.159,14.935 0.229,13.005 0.229,11.76 ; v1(9.347,18.339) 11.76,18.339 16.078,22.657 16.078,29.769 19.355,33.045 23.927,33.045 24.105,33.223 v1(24.105,34.366) ; v1(29.286,35.281) 29.718,35.712 v1(34.493,35.712) ; v1(32.652,4.191) 32.283,4.559 32.283,5.232 32.614,5.563 35.433,5.563 35.738,5.867 35.738,6.553 35.281,7.01 v1(35.281,7.214) ; v1(33.426,10.211) v1(33.426,15.088) ; v1(35.814,16.18) 36.855,16.18 37.16,16.485 v1@37.16,16.916 ; v1(41.808,24.359) 45.949,20.218 45.949,18.161 45.949,17.983
  Bottom Layer w0.508: v1@44.374,14.808 44.374,17.12 45.415,18.161 45.949,18.161 v1(49.022,18.161) ; v1(45.949,17.12) 45.949,17.983
  other v1: 37.186,16.967
GND: *.4 C2.1 C3.2 C4.2 C5.1 C6.2 C7.2 C8.2 C9.2 C10.1 C11.1 C12.1 C13.1 C14.1 C15.1 C16.1 C17.2 C18.2 C19.4 C19.5 C20.1 D3.C D4.C D5.C HC1.4 J1.12 J1.18 J1.31 J1.47 J1.63 J3.2 J3.S1 J3.S2 J4.2 J4.S1 J4.S2 ON/OFF.2 ON/OFF.3 P1.5 P1.6 R1.1 R3.1 R4.2 R6.2 R7.2 R9.1 R13.1 R15.2 RESET.2 STA.TR1.1 STA.TR2.1 STA.TR3.1 STA.TR4.1 SW1.1 SW2.1 U1.17 U3.2 U4.2 U5.11 U5.18 U5.20 | length 474
  Top Layer w0.203: R6.2@10.922,25.453 R6.2 ; U5.18 20.959,14.609 21.031,14.681 ; U5.20 20.717,15.554 21.031,15.24 21.031,14.681 ; C8.2 v1@20.912,11.997 ; v1@21.031,12.116 21.031,14.681 ; 21.082,37.047 21.106,37.023 J4.2 ; 25.248,15.896 C17.2@26.492,15.896 ; J3.2 31.496,36.982 ; C5.1 48.997,10.16 48.184,9.347 48.184,8.484 48.506,8.161 C2.1 49.471,8.161 49.886,7.747 49.886,5.791 50.343,5.334 53.647,5.334 53.848,5.133 v3(53.848,4.242)
  Top Layer w0.254: 0.229,7.29 0.267,7.328 R13.1 ; C19.5 1.854,14.351 1.295,13.792 C14.1 0.353,12.849 0.203,12.7 0.203,6.604 0.483,6.325 3.581,6.325 v1(3.651,6.255) v1@3.702,6.255 ; v1(5.944,1.905) 5.944,0.596 v1(5.981,0.559) ; v1(6.431,4.272) C15.1 ; v1(8.433,5.359) 8.293,5.499 R9.1 8.374,7.493 9.449,7.493 9.842,7.886 C13.1 ; R4.2 13.864,4.458 v1(11.239,4.458) 11.239,6.007 12.37,7.137 12.37,10.389 12.979,10.998 16.485,10.998 16.818,11.331 C6.2 15.418,13.056 14.961,13.513 14.961,18.771 16.739,20.549 24.892,20.549 25.248,20.193 25.248,16.993 ; C9.2 14.894,9.661 15.291,10.058 v1(21.057,10.058) ; C16.1 C16.1@15.748,35.712 ; J4.2 21.106,29.513 20.828,29.235 v1(20.828,28.27) v1(26.162,28.27) ; v1(21.59,25.095) 21.59,22.708 22.708,21.59 28.016,21.59 29.261,20.345 R15.2 27.483,18.263 26.492,17.272 C17.2@26.492,15.896 ; v1(23.597,16.84) 25.044,16.84 25.222,17.018 25.248,16.993 ; 27.432,10.236 27.203,10.465 26.547,10.465 C18.2 26.027,10.447 25.248,11.227 25.248,15.896 25.248,16.993 ; J3.S1@29.165,37.047 J3.S1 ; v1@31.039,28.321 v1(31.039,28.27) 31.039,27.254 31.826,26.467 34.138,26.467 34.62,25.984 34.62,19.71 35.027,19.304 36.728,19.304 37.009,19.023 J1.63 ; J1.12 34.512,10.719 35.306,10.719 35.484,10.897 35.484,11.608 35.738,11.862 v1(36.449,11.862) ; v1(37.008,7.62) 37.008,6.723 J1.18 ; C20.1 38.71,4.191 38.964,3.937 RESET.2 SW2.1 ; v1(40.665,3.226) 40.665,1.402 SW2.1 ; 43.509,6.021 J1.31 ; J1.47 45.213,15.721 45.009,15.926 45.009,19.152 45.961,20.103 D4.C 45.961,23.05 46.355,23.444 49.835,23.444 ; P1.6 P1.5 48.285,30.81 50.495,28.6 *.4@50.495,26.695 ; C4.2 49.7,14.74 49.987,14.453 v1(50.411,14.453) ; C10.1 49.522,19.169 49.86,19.507 49.86,23.419 49.835,23.444 ; *.4@49.86,26.06 *.4@50.495,26.695 ; 51.587,23.444 49.835,23.444 ; C12.1 51.63,24.163 50.495,25.298 *.4@50.495,26.695 ; U3.2 v1(54.966,19.126) ; U4.2 53.63,14.427 v3(53.713,14.427) 55.126,14.427 55.151,14.453 C3.2 ; v3(53.848,4.242) 52.68,4.242 52.527,4.089 52.527,2.007 50.978,0.457 45.72,0.457 44.78,1.397 SW2.1 ; 62.078,25.527 63.348,26.797 D3.C
  Top Layer w0.508: R6.2@10.922,25.453 R7.2 ; R3.1 50.546,11.616 50.546,10.906 50.529,10.888 50.529,10.516 ; R1.1 50.529,9.212 50.529,10.516 ; C12.1 C11.1 ; v3(51.714,10.541) 50.554,10.541 50.529,10.516 ; ON/OFF.3@62.027,23.901 ON/OFF.3
  Top Layer w0.762: C19.5 C19.4 6.325,18.059 v4(6.325,25.146) ; C16.1@15.748,35.712 16.713,35.712 18.047,37.047 J4.S1 21.082,37.047 J4.S2 J3.S1@29.165,37.047 ; J3.S1 32.766,37.018 J3.S2 37.007,36.805 v2(41.453,36.805) ; SW1.1 56.363,1.402 v4(56.363,2.108) ; ON/OFF.2 61.392,26.213 62.078,25.527 62.255,25.349 ON/OFF.3
  Bottom Layer w0.254: v1(3.651,6.255) 3.651,4.655 4.034,4.272 v1(6.431,4.272) ; v1(8.433,5.359) 8.763,5.69 10.726,5.69 11.239,5.176 v1(11.239,4.458) ; v1@8.471,5.321 8.014,5.321 6.964,4.272 v1(6.431,4.272) ; HC1.4 17.45,0.483 16.637,-0.33 10.846,-0.33 10.465,0.051 10.465,1.499 10.058,1.905 v1(7.569,1.905) v1(5.944,1.905) 5.944,3.048 6.431,3.535 v1(6.431,4.272) ; v1(20.828,28.27) 20.828,26.899 21.59,26.137 v1(21.59,25.095) ; v1(21.006,12.014) 21.057,11.963 v1(21.057,10.058) 23.47,10.058 23.698,10.287 23.698,16.739 v1(23.597,16.84) 23.597,16.967 v1@23.698,17.069 ; v1(26.162,28.27) 25.476,28.27 25.019,28.727 25.019,31.496 25.375,31.852 29.896,31.852 ; STA.TR2.1 30.312,28.285 29.896,28.702 29.896,31.852 ; STA.TR1.1 35.088,28.285 34.874,28.499 v1(34.874,29.21) 34.874,31.852 ; v1(36.449,11.862) 36.754,11.862 36.982,11.633 36.982,5.182 v1(37.998,4.166) ; v1@36.728,36.779 37.262,36.779 37.77,36.271 37.77,32.36 37.262,31.852 34.874,31.852 ; v1(40.665,3.226) 41.427,3.226 43.536,5.334 v1(43.536,5.766) ; v1@50.444,14.427 52.172,14.427 ; v3(53.713,14.427) 52.172,14.427 ; v3(53.848,4.242) 55.778,4.242 56.363,3.658 ; ON/OFF.2 55.753,26.213 54.966,25.425 v1(54.966,19.126) 54.966,17.501 54.61,17.145 52.502,17.145 52.172,16.815 52.172,14.427 ; 29.896,31.852 34.874,31.852
  Bottom Layer w0.508: v3(51.714,10.541) 53.086,10.541 53.713,11.168 v3(53.713,14.427)
  Bottom Layer w0.762: v4(6.325,25.146) 6.325,25.959 7.798,27.432 v4(10.897,27.432) 10.897,33.452 11.506,34.061 14.986,34.061 15.672,34.747 C16.1 ; v2(41.453,36.805) 42.139,37.49 48.311,37.49 ; *.4@50.495,26.695 50.495,28.524 v2(50.394,28.626) 48.285,30.734 P1.5 P1.6 48.285,37.465 48.311,37.49 ; v4(56.363,2.108) 56.363,3.658 57.506,4.801 62.713,4.801 63.424,5.512 63.424,20.32 62.255,21.488 ON/OFF.3 ; ON/OFF.2 59.461,30.378 57.988,31.852 57.988,36.322 56.82,37.49 48.311,37.49
  other v1: 4.42,0.279 9.5,2.159 40.589,4.089 21.031,5.639 21.311,7.671 4.877,9.271 22.631,9.296 9.842,9.954 23.724,13.284 23.647,14.249 0.559,14.681 23.673,15.215 5.486,17.17 0.559,17.424 23.546,18.288 9.093,19.456 0.559,19.99 16.891,22.428 19.914,22.428 6.248,22.454 22.758,22.454 0.559,22.53 9.169,23.317 21.692,23.571 0.559,25.705 19.964,27.178 6.375,27.991 25.121,28.143 35.848,28.26 0.559,28.448 26.162,29.21 17.475,29.312 4.445,30.607 11.1,30.683 8.585,30.861 34.595,31.217 37.236,31.217 0.559,31.471 32.995,31.547 31.521,31.572 30.15,31.598 22.454,31.877 21.26,31.902 6.883,32.487 11.049,33.071 5.613,33.528 5.486,35.763 27.864,36.576 30.607,36.601 32.766,36.601 35.382,36.627 36.703,36.855 4.953,37.389 7.366,37.414
  other v2: 46.965,19.38 59.487,22.327 51.46,22.631 45.695,22.987 48.768,22.987 59.461,23.546 63.729,27 62.179,27.559 56.007,27.889 41.935,28.6 60.452,29.947 59.03,30.023 59.055,32.715 63.424,32.715 56.21,33.249 40.945,34.112 58.852,36.906
  other v3: 52.934,2.667 52.807,5.766 52.52,12.497 55.161,13.462
  other v4: 58.369,2.159 10.897,25.352
  other v7: 16.434,15.545
Net*_1: *.1 J1.55 | length 9.2
  Top Layer w0.254: J1.55 41.009,19.165 42.875,21.031 *.1@42.875,26.695
Net*_2: *.2 J1.46 P1.4 | length 22.9
  Top Layer w0.254: *.2@45.415,26.695 45.415,25.248 44.501,24.333 44.501,15.646 44.926,15.221 J1.46
  Bottom Layer w0.254: *.2@45.415,26.695 45.415,28.804 46.939,30.328 46.939,34.493 46.634,34.798 P1.4
Net*_3: *.3 C20.2 J1.7 P1.1 R14.2 RESET.1 | length 60.8
  Top Layer w0.203: v1(31.674,15.57) 31.674,18.669 v1(32.182,19.177) ; v1(31.725,13.056) 31.89,13.221 J1.7 v1@35.712,13.221 ; v1@32.131,19.177 v1(32.182,19.177) ; v1@32.182,19.101 v1(32.182,19.177) ; v1(35.509,20.396) 40.107,20.396 40.437,20.726 v1(40.437,27.305)
  Top Layer w0.254: RESET.1 33.477,1.397 34.053,1.973 R14.2 v1(35.496,4.191) C20.2 ; P1.1@43.205,32.055 P1.1 43.205,32.537 43.332,32.41 43.332,30.607 43.84,30.099 47.523,30.099 47.955,29.667 *.3@47.955,26.695
  Bottom Layer w0.203: v1(31.674,15.57) 31.674,13.106 v1(31.725,13.056) ; v1(32.182,19.177) 32.182,19.279 33.299,20.396 v1(35.509,20.396) ; v1(35.496,4.191) 35.966,4.191 36.17,4.394 36.17,11.176 35.712,11.633 v1(35.712,13.208) ; v1(40.437,27.305) 40.437,31.191 41.504,32.258 P1.1
Net*_5: *.5 J1.49 P1.2 | length 42.1
  Top Layer w0.203: J1.49 44.009,28.406
  Top Layer w0.254: 44.009,28.406 42.012,30.404 42.012,34.442 42.367,34.798 P1.2 43.205,36.144 43.739,36.678 54.254,36.678 54.991,35.941 54.991,30.912 53.035,28.956 *.5@53.035,26.695
NetC1_1: C1.1 ON/OFF.1 S1.2 | length 39.2
  Top Layer w0.762: C1.1@55.347,8.179 55.982,8.179 56.21,7.95 56.21,5.334 56.591,4.953 63.043,4.953 63.348,5.258 63.348,12.827 ; ON/OFF.1 56.667,22.022 57.709,20.98 62.814,20.98 63.348,20.447 63.348,12.827 ; S1.2 63.294,12.773 63.348,12.827
NetC1_2: C1.2 Q1.3 S1.1 | length 12
  Top Layer w0.762: Q1.3 55.347,10.498 ; C1.2 55.27,10.422 55.347,10.498 ; S1.1 57.81,15.773 56.947,14.91 56.947,13.068 56.972,13.043 56.972,11.633 55.837,10.498 55.347,10.498
NetC2_2: C2.2 J1.8 R2.1 R3.2 | length 49.3
  Top Layer w0.203: J1.8 35.259,12.721 35.509,12.471 36.576,12.471 37.008,12.903 v1(37.008,14.986) ; v1(39.116,11.354) 39.167,11.303 42.596,11.303 43.205,10.693 v1@43.205,8.23 ; v1(41.58,4.293) 41.58,3.404 42.291,2.692 v1(43.815,2.692)
  Top Layer w0.254: C2.2 49.098,9.593 49.632,10.127 49.632,12.294 49.835,12.497 51.46,12.497 51.529,12.429 R3.2 R2.1
  Bottom Layer w0.203: v1(37.008,14.986) 37.211,15.189 37.694,15.189 38.887,13.995 38.887,11.582 v1(39.116,11.354) ; v1(41.58,4.293) 41.58,6.248 43.18,7.849 v1(43.18,8.23) ; v1(43.815,2.692) 48.92,2.692 49.632,3.404 49.632,12.268 49.784,12.421 v1@50.063,12.421
  other v1: 50.038,12.446
NetC3_1: C3.1 C11.2 D1.K Q1.2 R2.2 U1.6 U2.3 U3.1 U3.3 U4.1 U4.3 | length 116.2
  Top Layer w0.203: v1(5.232,11.633) v1@5.309,11.633 ; v1@19.406,5.08 v1(19.406,5.156)
  Top Layer w0.254: U4.3 53.604,16.637 ; R2.2 55.339,12.362 55.651,12.675 v3(56.083,12.675)
  Top Layer w0.381: U1.6 5.127,11.451 v1@5.309,11.633 ; v1(12.268,11.786) v1(15.24,11.786) ; U2.3 18.833,4.507 v1@19.406,5.08 ; v1(19.406,5.156) 20.295,4.267 30.48,4.267 31.14,3.607 31.14,2.464 30.378,1.702 v2(30.378,1.397)
  Top Layer w0.508: v1(27.026,0.178) 27.407,-0.203 54,-0.203 54.784,0.58 D1.K ; U3.1 52.537,18.176 52.299,18.415 52.299,20.498 52.578,20.777 53.492,20.777 ; U3.3 53.503,20.767 53.492,20.777 ; U4.1 52.639,13.503 52.451,13.691 52.451,16.281 52.934,16.764 v4(56.032,16.764) 56.032,20.65 54.991,21.692 C11.2 53.873,20.853 53.797,20.777 53.492,20.777 ; C3.1 55.194,16.535
  Top Layer w0.762: Q1.2 53.833,6.467 54.102,6.198 D1.K@54.458,6.198
  Bottom Layer w0.203: v1(19.406,5.156) v1@19.583,5.334
  Bottom Layer w0.381: v1(5.232,11.633) 5.385,11.786 v1(12.268,11.786) ; v1(15.24,11.786) 17.856,11.786 19.583,10.058 v1@19.583,5.334 ; v1(27.026,0.178) 27.026,1.753 27.457,2.184 29.083,2.184 29.87,1.397 v2(30.378,1.397)
  Bottom Layer w0.508: v3(54.788,6.198) 54.788,9.593 54.784,9.597 56.083,10.897 v3(56.083,12.675) v4@56.083,16.764
NetC4_1: C4.1 U4.4 | length 2.2
  Top Layer w0.254: C4.1 49.589,15.74 49.926,15.403 U4.4
NetC8_1: C8.1 U5.10 | length 7.1
  Top Layer w0.203: v6@16.307,14.122 15.799,14.63 15.799,15.621 16.002,15.824 16.014,15.824 16.144,15.954 U5.10
  Bottom Layer w0.203: v6(16.383,14.199) 16.383,14.173 16.815,13.741 19.456,13.741 19.964,13.233 v1@19.964,13.005
  other v1: 19.99,12.954
NetC12_2: C12.2 U3.4 | length 1.8
  Top Layer w0.508: C12.2 50.63,21.176 50.993,20.813 U3.4
NetC13_2: C13.2 R8.1 | length 1.6
  Top Layer w0.254: R8.1 8.275,10.928 C13.2
NetC14_2: C14.2 R10.1 U1.13 | length 15.9
  Top Layer w0.203: C14.2 2.943,12.849 v1(2.946,12.852) ; R10.1 5.359,12.854 5.359,13.462 5.563,13.665 6.375,13.665 6.553,13.843 v1(6.553,14.046)
  Top Layer w0.254: v1(2.642,7.493) 3.988,7.493 4.102,7.607 U1.13
  Bottom Layer w0.203: v1(2.946,12.852) 2.946,14.173 3.226,14.453 6.401,14.453 6.553,14.3 v1(6.553,14.046)
  Bottom Layer w0.254: v1(2.642,7.493) 2.083,8.052 2.083,11.341 2.946,12.205 v1(2.946,12.852)
NetC15_2: C15.2 J1.39 R11.1 U1.14 | length 60.2
  Top Layer w0.203: U1.14 4.627,5.509 4.627,3.958 5.385,3.2 29.032,3.2 29.261,2.972 29.261,1.016 29.794,0.483 37.414,0.483 v1(37.643,0.711) ; J1.39 46.775,11.721 v1@47.244,11.252
  Top Layer w0.254: R11.1 4.627,5.509 C15.2
  Bottom Layer w0.203: v1(37.643,0.711) 40.386,0.711 47.244,7.569 v1@47.244,11.049
  other v1: 47.193,11.049
NetC16_3: C16.3 J1.35 | length 60.4
  Top Layer w0.203: v1(44.806,9.721) J1.35
  Bottom Layer w0.203: C16.3 12.268,37.465 37.643,37.465 38.456,36.652 38.456,25.832 43.028,21.26 43.028,10.16 43.466,9.721 v1(44.806,9.721)
NetC16_4: C16.4 J1.37 | length 62.9
  Top Layer w0.203: v1(44.806,10.693) 45.981,10.693 J1.37
  Bottom Layer w0.203: C16.4 8.052,36.601 9.373,37.922 38.1,37.922 39.37,36.652 39.37,25.806 43.637,21.539 43.637,11.328 44.272,10.693 v1(44.806,10.693)
NetC17_1: C17.1 CT1.2 J1.5 | length 8.4
  Top Layer w0.254: C17.1 27.288,14.994 27.686,15.392 CT1.2 ; CT1.2@29.781,15.392 30.34,14.834 31.775,14.834 32.388,14.221 J1.5
NetC18_1: C18.1 CT1.1 J1.6 | length 9.9
  Top Layer w0.254: C18.1 27.465,11.447 27.838,11.074 CT1.1 ; CT1.1@29.781,11.074 29.781,12.661 30.841,13.721 J1.6
NetC19_2: C19.2 J1.16 | length 43.2
  Top Layer w0.203: v1(33.553,8.712) 34.5,8.712 J1.16
  Bottom Layer w0.203: C19.2 5.156,21.209 9.246,17.12 12.167,17.12 16.688,21.641 27.356,21.641 32.842,16.154 32.842,9.068 33.198,8.712 v1(33.553,8.712)
NetC19_7: C19.7 J1.17 | length 49.4
  Top Layer w0.203: v1(34.874,6.375) 36.509,6.375 J1.17
  Bottom Layer w0.203: C19.7 3.099,19.964 5.537,19.964 9.068,16.434 12.421,16.434 17.094,21.107 27.127,21.107 32.36,15.875 32.36,8.382 34.366,6.375 v1(34.874,6.375)
NetD1_A: D1.A Q1.1 R1.2 | length 5.1
  Top Layer w0.254: R1.2 50.546,7.493 51.084,6.955 D1.A 51.765,6.198 51.933,6.365 Q1.1
NetD2_1: D2.1 R21.2 | length 1.6
  Bottom Layer w0.254: R21.2 32.995,25.349 v1(33.02,25.324)
NetD2_2: D2.2 R22.2 | length 1.7
  Bottom Layer w0.254: R22.2 32.995,23.749 v1(33.045,23.698)
NetD2_3: D2.3 R23.2 | length 1.6
  Bottom Layer w0.254: R23.2 32.995,22.149 v1(33.02,22.123)
NetD2_4: D2.4 STA.TR4.2 | length 18.8
  Top Layer w0.254: v1@36.195,22.174 37.505,22.174 D2.4
  Bottom Layer w0.254: STA.TR4.2@24.046,29.159 24.046,27.669 25.044,26.67 33.122,26.67 34.163,25.629 34.163,23.114 35.103,22.174 v1(36.144,22.174) v1@36.22,22.174
NetD2_5: D2.5 STA.TR2.2 | length 12.5
  Top Layer w0.254: v1@36.195,23.749 D2.5
  Bottom Layer w0.254: STA.TR2.2 28.872,28.304 29.896,27.28 33.299,27.28 34.722,25.857 34.722,24.079 35.052,23.749 v1(36.144,23.749) v1@36.22,23.749
NetD2_6: D2.6 STA.TR1.2 | length 6.2
  Top Layer w0.254: v1(36.144,25.362) 37.518,25.362 D2.6
  Bottom Layer w0.254: STA.TR1.2@33.723,29.21 33.723,27.783 v1(36.144,25.362)
NetD3_A: D3.A R18.2 | length 1.7
  Top Layer w0.254: R18.2 61.709,29.935 D3.A
NetD4_A: D4.A R16.2 | length 1.6
  Top Layer w0.254: D4.A 47.562,21.565 R16.2
NetD5_A: D5.A R17.2 | length 2
  Top Layer w0.203: D5.A 8.23,0.559 8.73,1.059 R17.2
NetHC1_1: HC1.1 R17.1 | length 17.1
  Top Layer w0.203: R17.1@9.246,0.287 9.431,0.102 10.389,0.102 10.846,-0.356 24.689,-0.356 25.07,0.025 HC1.1
NetHC1_2: HC1.2 J1.58 | length 34
  Top Layer w0.203: J1.58 39.497,18.209 39.497,17.66 40.03,17.127 v1(40.03,16.891)
  Bottom Layer w0.203: HC1.2 24.613,2.997 39.395,2.997 39.776,3.378 39.776,9.144 40.691,10.058 40.691,14.503 40.03,15.164 v1(40.03,16.891)
NetHC1_3: HC1.3 J1.59 | length 36.2
  Top Layer w0.203: v1(38.811,16.916) 38.811,17.12 39.014,17.323 39.014,18.216 J1.59
  Bottom Layer w0.203: HC1.3@19.99,0.787 HC1.3 19.99,1.067 22.504,3.581 39.167,3.581 39.395,3.81 39.395,9.373 40.208,10.185 40.208,14.021 38.811,15.418 v1(38.811,16.916)
NetJ1_9: J1.9 U5.22 | length 25.6
  Top Layer w0.203: U5.22 21.085,16.354 21.971,15.469 21.971,12.141 27.026,7.087 27.026,6.452 v1(27.483,5.994) ; v1(31.725,12.116) 31.83,12.221 J1.9
  Bottom Layer w0.203: v1(27.483,5.994) 28.727,5.994 31.674,8.941 31.674,12.065 v1(31.725,12.116)
NetJ1_10: J1.10 U5.9 | length 29.3
  Top Layer w0.203: v6(15.824,16.281) 15.897,16.354 U5.9 ; v1(18.796,12.548) 18.796,11.659 19.456,10.998 22.288,10.998 26.314,6.972 v1(26.314,6.655) ; v1(29.947,8.89) 29.947,8.915 32.753,11.721 J1.10
  Bottom Layer w0.203: v6(15.824,16.281) 15.469,16.281 15.316,16.129 15.316,13.208 15.977,12.548 v1(18.796,12.548) v1@18.796,12.497 ; v1(26.314,6.655) 27.711,6.655 v1(29.947,8.89)
NetJ1_11: J1.11 U5.24 | length 22
  Top Layer w0.203: U5.24 22.139,17.154 22.962,16.332 22.962,12.649 27.838,7.772 29.794,7.772 33.243,11.221 J1.11
NetJ1_14: J1.14 J4.3 | length 36.1
  Top Layer w0.203: J4.3 22.106,33.647 22.733,33.02 27.762,33.02 28.677,32.106 28.677,24.232 37.795,15.113 37.795,12.268 35.23,9.703 34.528,9.703 J1.14
NetJ1_15: J1.15 J4.4 | length 36.6
  Top Layer w0.203: J4.4 23.106,33.663 23.368,33.401 28.219,33.401 29.21,32.41 29.21,24.232 38.303,15.138 38.303,12.065 35.46,9.221 J1.15
NetJ1_21: J1.21 R26.2 | length 31.6
  Top Layer w0.203: v1(37.668,8.636) 38.509,7.795 J1.21
  Bottom Layer w0.203: R26.2 22.53,26.391 23.546,25.375 23.546,22.606 24.054,22.098 28.296,22.098 37.668,12.725 v1(37.668,8.636)
NetJ1_22: J1.22 J3.3 | length 34.3
  Top Layer w0.203: J3.3 32.493,33.344 33.833,32.004 37.922,32.004 38.735,31.191 v1(38.735,21.336) v1@38.735,21.285 ; J1.22 39.009,10 38.849,10.16 v1(39.014,10.16)
  Bottom Layer w0.203: v1@38.735,21.285 38.735,20.422 37.973,19.66 37.973,15.637 39.726,13.884 39.726,10.871 v1(39.014,10.16)
NetJ1_23: J1.23 J3.4 | length 34
  Top Layer w0.203: J3.4 33.493,33.41 33.96,32.944 38.024,32.944 39.319,31.648 39.319,21.692 39.599,21.412 v1(39.599,21.336) ; J1.23 39.509,7.962 v1@40.335,8.788
  Bottom Layer w0.203: v1(39.599,21.336) 39.675,21.336 41.148,19.863 41.148,9.601 v1@40.335,8.788
  other v1: 40.335,8.839
NetJ1_26: J1.26 R28.2 | length 32.1
  Top Layer w0.203: v1(27.711,27.864) 28.194,27.381 28.194,24.028 34.392,17.831 v1(34.392,17.577) ; v1(38.354,9.398) 38.354,10.49 38.659,10.795 40.818,10.795 41.009,10.604 J1.26
  Bottom Layer w0.203: R28.2 27.559,28.016 v1(27.711,27.864) ; v1(34.392,17.577) 34.392,16.713 38.354,12.751 v1(38.354,9.398)
NetJ1_27: J1.27 R27.2 | length 28.6
  Top Layer w0.203: v1(32.36,28.321) 32.36,27.61 32.995,26.975 v1(36.144,26.975) v1@36.22,26.975 ; J1.27 41.509,8.692 v1@41.529,8.712
  Bottom Layer w0.203: v1(32.36,28.321) R27.2 ; v1@36.22,26.975 36.5,26.975 36.703,26.772 36.703,25.984 41.808,20.879 41.808,8.992 v1@41.529,8.712
  other v1: 41.529,8.839
NetJ1_28: J1.28 R24.2 | length 24.8
  Top Layer w0.203: J1.28@42.012,6.724 42.012,7.722 42.443,8.153 v1(42.443,8.839)
  Top Layer w0.254: J1.28 J1.28@42.012,6.724
  Bottom Layer w0.203: R24.2@37.186,29.167 37.186,26.314 42.443,21.057 v1(42.443,8.839)
NetJ1_30: J1.30 U5.23 | length 30.6
  Top Layer w0.203: U5.23 21.6,16.754 22.454,15.9 22.454,12.471 29.235,5.69 42.799,5.69 43.009,5.9 J1.30
NetJ1_34: J1.34 R16.1 | length 13.3
  Top Layer w0.203: J1.34 46.636,9.221 47.981,10.566 47.981,20.066 48.479,20.565 R16.1
NetJ1_40: J1.40 U1.1 | length 71.5
  Top Layer w0.203: U1.1 6.719,8.521 v1(7.01,8.23) v1@7.112,8.23 ; v1(24.663,6.604) 24.663,5.842 25.654,4.851 47.447,4.851 47.727,5.131 v1(47.727,6.401) ; J1.40 47.342,12.221 v1(47.473,12.09)
  Bottom Layer w0.203: v1(7.01,8.23) 10.719,8.23 14.986,12.497 14.986,17.247 17.348,19.609 24.079,19.609 24.663,19.025 v1(24.663,6.604) ; v1@47.625,11.963 47.727,11.862 v1(47.727,6.401)
NetJ1_41: J1.41 U1.2 | length 73.6
  Top Layer w0.203: U1.2 7.184,9.046 v1(7.214,9.017) ; v1(25.552,5.994) 25.552,5.766 26.06,5.258 46.685,5.258 v1(47.041,5.613) ; J1.41 46.03,12.7 47.015,12.7 v1(47.219,12.903)
  Bottom Layer w0.203: v1(7.214,9.017) 10.693,9.017 14.402,12.725 14.402,17.577 17.348,20.523 25.019,20.523 25.502,20.041 25.502,6.248 ; v1(47.041,5.613) 48.184,5.613 48.565,5.994 48.565,11.887 47.549,12.903 v1(47.219,12.903)
NetJ1_42: J1.42 U1.16 | length 46.8
  Top Layer w0.203: U1.16 6.582,7.896 6.985,7.493 v1(6.985,7.112) ; v1(32.893,6.426) 33.426,6.426 40.222,13.221 J1.42
  Bottom Layer w0.203: v1(6.985,7.112) 7.442,6.655 11.811,6.655 12.103,6.363 12.103,4.788 12.776,4.115 29.718,4.115 32.029,6.426 v1(32.893,6.426)
NetJ1_43: J1.43 U1.15 | length 55.9
  Top Layer w0.203: U1.15 5.127,6.481 5.436,6.172 7.214,6.172 7.391,5.994 7.391,4.089 7.823,3.658 29.769,3.658 30.15,3.277 v1(30.15,2.413) ; J1.43 46.014,13.716 v1(47.193,13.716)
  Bottom Layer w0.203: v1(30.15,2.413) 41.478,2.413 45.999,6.934 45.999,12.522 v1(47.193,13.716)
NetJ1_44: J1.44 R19.2 SW1.2 | length 24.9
  Top Layer w0.203: J1.44 47.165,14.221 47.447,14.503 v1@47.447,16.662 ; v1(48.768,16.764) 48.362,16.358 48.362,10.312 47.625,9.576 47.625,8.052 49.454,6.223 49.454,5.283 49.835,4.902 51.156,4.902 51.376,4.682 R19.2
  Top Layer w0.254: SW1.2 51.079,1.397 51.376,1.694 R19.2
  Bottom Layer w0.203: v1@47.574,16.764 v1(48.768,16.764)
  other v1: 47.396,16.662
NetJ1_45: J1.45 R20.2 SW2.2 | length 21.7
  Top Layer w0.203: v1(44.831,4.089) 44.755,4.089 44.704,4.14 R20.2 ; J1.45 46.02,14.732 v1(46.812,14.732)
  Top Layer w0.254: R20.2 45.634,2.194 46.431,1.397 SW2.2
  Bottom Layer w0.203: v1(44.831,4.089) 44.831,4.547 45.212,4.928 48.717,4.928 49.098,5.309 49.098,12.633 48.803,12.929 46.999,14.732 v1(46.812,14.732)
NetJ1_56: J1.56
NetJ1_60: J1.60 R15.1 | length 12.2
  Top Layer w0.254: R15.1 30.261,19.263 31.115,20.117 v1(31.115,20.168) ; v1(36.982,19.837) 37.897,19.837 38.509,19.225 J1.60
  Bottom Layer w0.254: v1(31.115,20.168) 31.166,20.168 31.953,20.955 36.678,20.955 37.008,20.625 v1@37.008,19.837
NetJ3_1: J3.1 U1.3 | length 45.5
  Top Layer w0.203: U1.3 7.032,9.546 7.556,10.071 7.556,11.671 12.903,17.018 12.903,28.854 v1(12.929,28.88) ; v1(29.54,34.265) 30.265,34.265 J3.1
  Bottom Layer w0.203: v1(12.929,28.88) 12.929,30.836 18.72,36.627 26.721,36.627 29.083,34.265 v1(29.54,34.265)
NetJ3_6: J3.6 U1.5 | length 53.1
  Top Layer w0.203: U1.5 6.505,10.696 6.731,10.922 6.731,12.116 8.382,13.767 8.384,13.767 10.236,15.619 v1(10.236,19.38) ; J3.6 35.519,34.468 v1(36.805,34.468)
  Bottom Layer w0.203: v1(10.236,19.38) 10.236,22.657 13.691,26.111 13.691,30.683 19.177,36.17 26.314,36.17 29.439,33.045 36.601,33.045 36.805,33.249 v1(36.805,34.468)
NetJ4_1: J4.1 U1.10 | length 37
  Top Layer w0.203: U1.10@3.473,9.55 U1.10 ; v1@15.24,28.524 v1(15.24,28.55)
  Top Layer w0.381: v1(2.819,11.151) 2.388,10.719 2.388,9.754 2.591,9.55 U1.10@3.473,9.55 ; v1(11.582,14.097) 13.589,16.104 13.589,26.873 v1@15.24,28.524 ; v1(19.406,34.315) J4.1@20.106,34.315
  Bottom Layer w0.203: v1@11.506,14.097 v1(11.582,14.097) ; v1@19.152,34.315 v1(19.406,34.315)
  Bottom Layer w0.381: v1(2.819,11.151) 4.064,12.395 9.804,12.395 v1@11.506,14.097 ; v1(15.24,28.55) 15.24,30.404 v1@19.152,34.315
NetJ4_6: J4.6 U1.8 | length 43.7
  Top Layer w0.203: v1@14.453,29.769 v1(14.529,29.845) ; J4.6 J4.6@25.261,34.366
  Top Layer w0.381: U1.8 4.102,12.943 8.153,16.995 ; 8.153,29.134 8.788,29.769 v1@14.453,29.769
  Top Layer w0.406: 8.153,16.995 8.153,29.134
  Top Layer w0.508: J4.6@25.261,34.366 v1(26.264,34.366)